# Altium PCB XM-JLINK-V1.0.0.PcbDoc
Units mil, origin at the board's own origin, x right, y up, seen from the top; angles counter-clockwise.
Board outline 3425.2 x 1574.8 mil, 2 copper layers (Top Layer, Bottom Layer); 38 components, 29 nets, 149 pads, 56 vias.
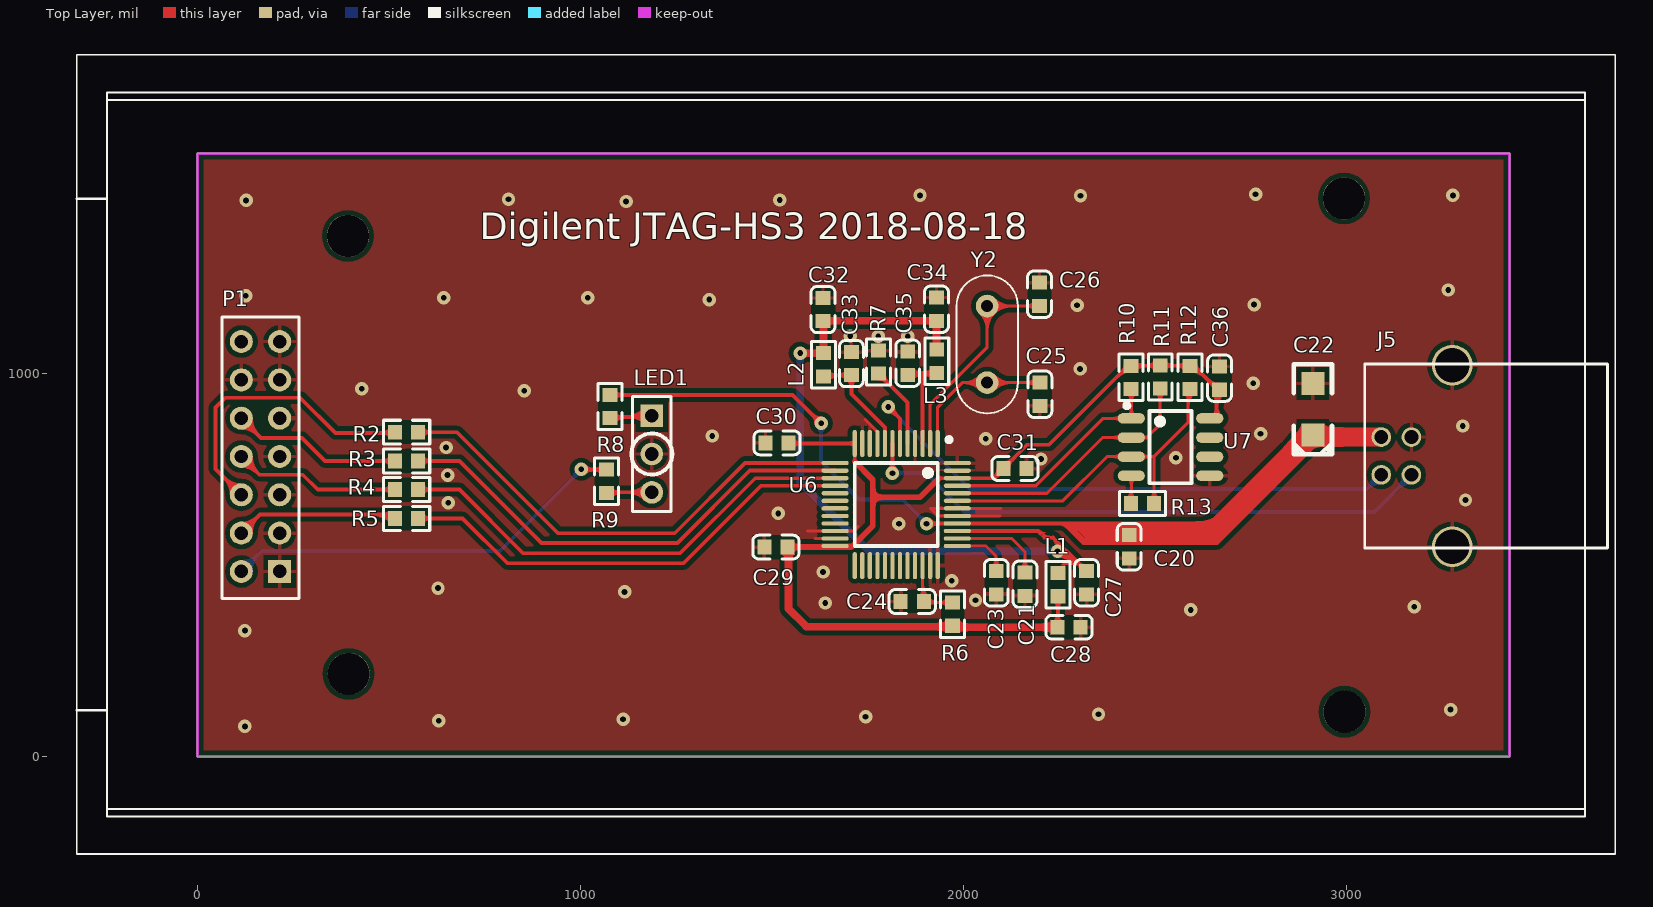
[diagram p0: Top Layer view]
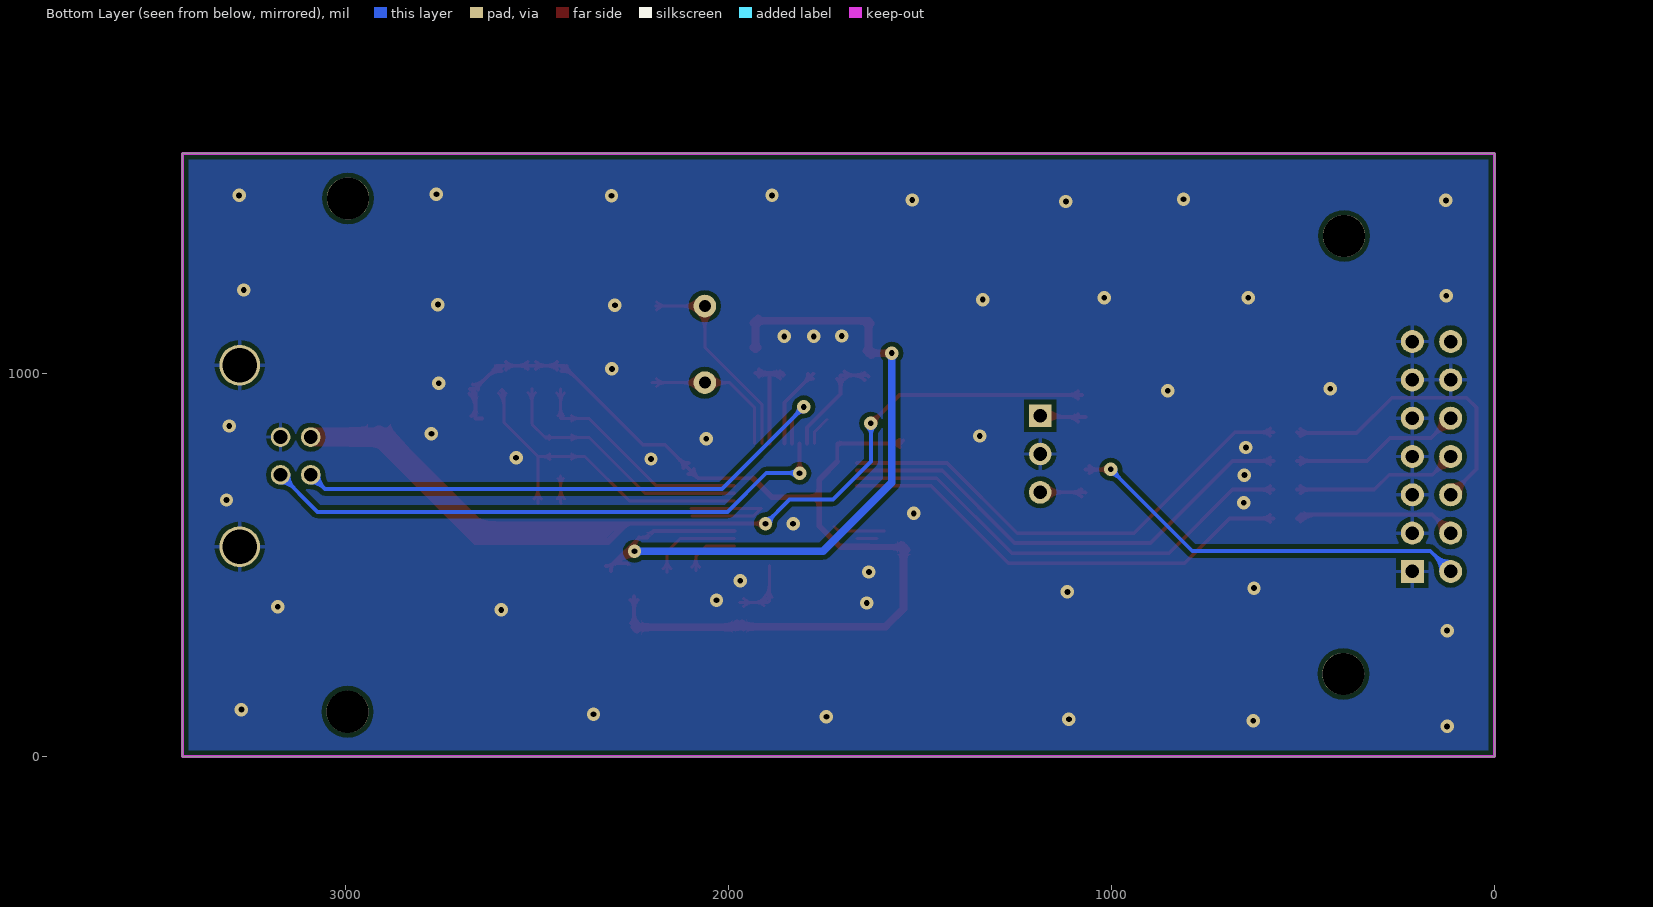
[diagram p1: Bottom Layer view, seen from below]
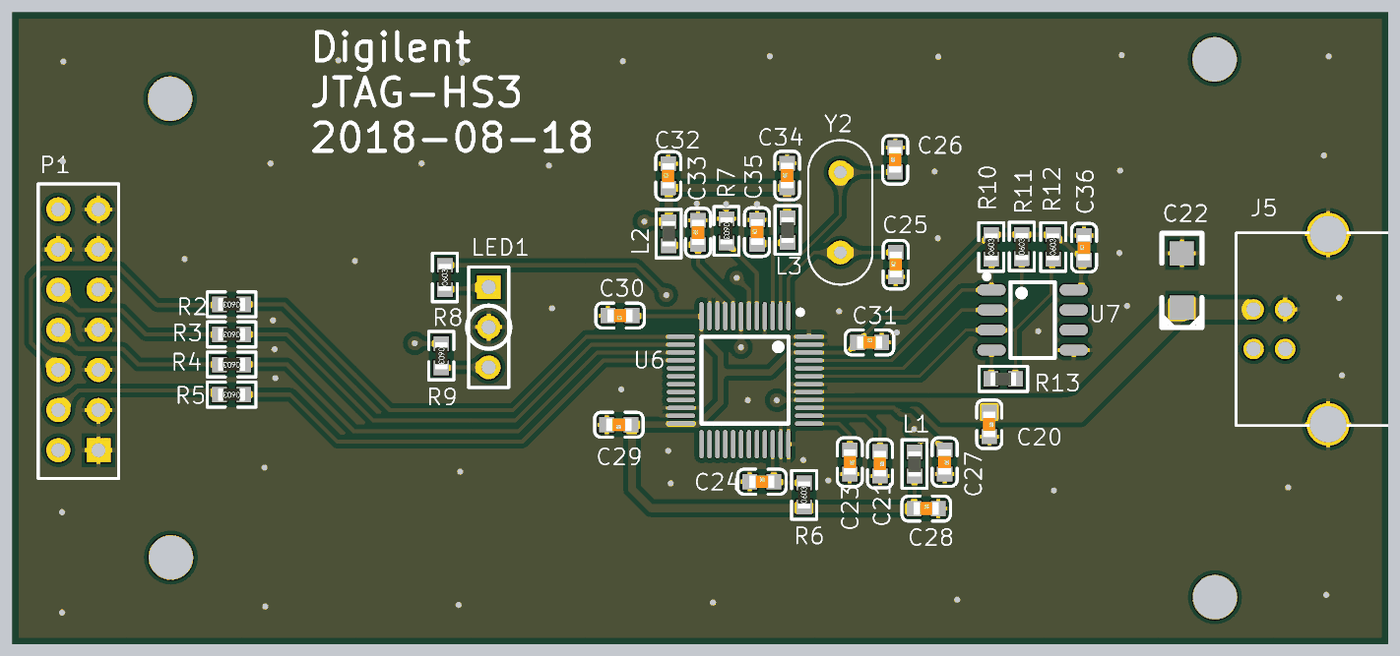
[diagram p2: 3D render of the assembled board from above, using the file's embedded part models]

## Layer stack, top to bottom
Top Layer: signal copper 1.4
Dielectric: dielectric 12.6, FR-4, Dk 4.8
Bottom Layer: signal copper 1.4

## Board outline
0,0 3425.2,0 3425.2,1574.8 0,1574.8

## Design rules (kind name [scope] priority, off if disabled: settings)
Clearance Clearance_1 [All] p1 off: gap=12
Clearance [All] p2: gap=8
ComponentClearance [All] p1: gap=0 collisioncheckmode=3 verticalgap=0 showdistances=FALSE
FabricationTestPointUsage TestPointUsage [All] p1: valid=0 allowmultiple=FALSE
FabricationTestpoint Testpoint [All] p1: side=3 testpointundercomponent=TRUE minsize=40 maxsize=100 preferedsize=60 minholesize=0 maxholesize=40 preferedholesize=32.01 testpointgrid=0.98 allowsidetop=TRUE allowsidebottom=TRUE usegrid=TRUE gridtolerance=0.01
HoleSize [All] p1: absolutevalues=TRUE maxlimit=200 minlimit=1 maxpercent=80.000 minpercent=20.000
HoleToHoleClearance [All] p1: gap=0 allowstackedmicrovias=TRUE
MinimumSolderMaskSliver [All] p1: minsoldermaskwidth=0
PolygonConnect [IsVia] p1: connectstyle=Direct reliefconductorwidth=10 reliefentries=4 polygonreliefangle="90 Angle"
RoutingLayers [All] p1: top layer_v5=FALSE bottom layer_v5=FALSE
RoutingVias [All] p1: holewidth=20 width=40 viastyle="Through Hole" minholewidth=15 minwidth=30 maxholewidth=20 maxwidth=40
SilkToSilkClearance [All] p1: silktosilkclearance=0
SilkscreenOverComponentPads [IsPad] p1: minsilkscreentomaskgap=0
SolderMaskExpansion [All] p1: expansion=4
Width [All] p1: maxlimit=50 minlimit=8 preferedwidth=10
19 further rules are at their usual default settings.

## Components (designator, comment, footprint, x,y, rotation, side; value= is the part's Value field where it differs from the comment)
C20 "0.1uF" LC-0603_C 2432,548 r270 top
C21 "0.1uF" LC-0603_C 2160,450 r270 top
C22 "10uF" C1206 2912,839 r90 top
C23 "0.1uF" LC-0603_C 2085,454 r270 top
C24 "0.1uF" LC-0603_C 1866,405 r0 top
C25 "27pF" LC-0603_C 2199,946 r90 top
C26 "27pF" LC-0603_C 2198,1207 r90 top
C27 "0.1uF" LC-0603_C 2321,454 r270 top
C28 "0.1uF" LC-0603_C 2275,338 r0 top
C29 "0.1uF" LC-0603_C 1510,547 r180 top
C30 "0.1uF" LC-0603_C 1513,819 r180 top
C31 "0.1uF" LC-0603_C 2134,752 r0 top
C32 "0.1uF" LC-0603_C 1633,1167 r90 top
C33 "0.1uF" LC-0603_C 1707,1026 r90 top
C34 "0.1uF" LC-0603_C 1929,1168 r90 top
C35 "0.1uF" LC-0603_C 1854,1027 r90 top
C36 "0.1uF" LC-0603_C 2668,988 r90 top
J5 "USB" USB-B 3090,785 r90 top locked
L1 "120OHM@100Mhz" LC-0603_L 2246,449 r270 top
L2 "120OHM@100Mhz" LC-0603_L 1634,1023 r270 top
L3 "120OHM@100Mhz" LC-0603_L 1930,1032 r270 top
LED1 "LED2" HDR1X3 1186,890 r270 top
P1 "Header 7X2" HDR2X14 215,295 r90 top locked
R2 "Res1" LC-0603_R 546,847 r180 top
R3 "Res1" LC-0603_R 546,772 r180 top
R4 "Res1" LC-0603_R 546,697 r180 top
R5 "Res1" LC-0603_R 546,622 r180 top
R6 "Res1" LC-0603_R 1971,372 r90 top
R7 "Res1" LC-0603_R 1778,1030 r270 top
R8 "Res1" LC-0603_R 1077,914 r90 top
R9 "Res1" LC-0603_R 1068,719 r270 top
R10 "Res1" LC-0603_R 2437,990 r90 top
R11 "Res1" LC-0603_R 2513,991 r90 top
R12 "Res1" LC-0603_R 2591,990 r90 top
R13 "Res1" LC-0603_L 2467,661 r180 top
U6 "FT232HL" LC-TQFP-48_7x7x05P 1824,658 r180 top
U7 "93LC56BISN" LC-SOIC-8_150mil 2540,808 r270 top
Y2 "12M" CRYSTAL 2010,1102 r90 top

## Footprints (in the part's own frame and the unit in brackets; to place one, negate y for a bottom-side part, rotate by r counter-clockwise, add the part's x,y. Pads: shape width x height; smd on the part's side, far side on the other; paste and mask are expansions set on the pad)
C1206 [mil]
  rect 60x60 smd: 1(0.12,0.45) 2(135.12,0.45)
  silkscreen extent -50,-50 185,50
CRYSTAL [mm]
  round 1.5 hole 0.8: 1(1.884,-1.304) 2(-3.196,-1.304)
  silkscreen extent -5.23,-3.34 3.92,0.73
HDR1X3 [mm] "Connector; Header; 3 Position"
  rect 1.5x1.5 hole 0.9: 1(0,0)
  round 1.5 hole 0.9: 2(2.54,0) 3(5.08,0)
  silkscreen extent -1.27,-1.27 6.35,1.27
HDR2X14 [mil]
  rect 60x60 hole 35: 1(188.52,0.36)
  round 60 hole 35: 2(188.52,100.36) 3(288.52,0.36) 4(288.52,100.36) 5(388.52,0.36) 6(388.52,100.36) 7(488.52,0.36) 8(488.52,100.36) 9(588.52,0.36) 10(588.52,100.36) 11(688.52,0.36) 12(688.52,100.36) 13(788.52,0.36) 14(788.52,100.36)
  silkscreen extent 118,-50 852,150
LC-0603_C [mm]
  rect 0.93x0.98 smd: 1(-0.77,0) 2(0.77,0)
  silkscreen extent -1.53,-0.79 1.54,0.79, body extent -0.8,-0.4 0.8,0.4, height 0.3
LC-0603_L [mm]
  rect 0.93x0.98 smd: 1(-0.77,0) 2(0.77,0)
  silkscreen extent -1.53,-0.79 1.54,0.79, body extent -0.82,-0.41 0.82,0.41, height 0.46
LC-0603_R [mm]
  rect 0.93x0.98 smd: 1(-0.77,0) 2(0.77,0)
  silkscreen extent -1.53,-0.79 1.54,0.79, body extent -0.85,-0.4 0.85,0.4, height 0.56
LC-SOIC-8_150mil [mm]
  oval 0.7x1.8 smd: 1(-1.905,-2.6) 2(-0.635,-2.6) 3(0.635,-2.6) 4(1.905,-2.6) 5(1.905,2.6) 6(0.635,2.6) 7(-0.635,2.6) 8(-1.905,2.6)
  silkscreen extent -2.9,-3.05 2.4,1.4
LC-TQFP-48_7x7x05P [mm]
  oval 0.28x1.8 smd mask+0.051: 1(-2.75,-4.05) 2(-2.25,-4.05) 3(-1.75,-4.05) 4(-1.25,-4.05) 5(-0.75,-4.05) 6(-0.25,-4.05) 7(0.25,-4.05) 8(0.75,-4.05) 9(1.25,-4.05) 10(1.75,-4.05) 11(2.25,-4.05) 12(2.75,-4.05) 25(2.75,4.05) 26(2.25,4.05) 27(1.75,4.05) 28(1.25,4.05) 29(0.75,4.05) 30(0.25,4.05) 31(-0.25,4.05) 32(-0.75,4.05) 33(-1.25,4.05) 34(-1.75,4.05) 35(-2.25,4.05) 36(-2.75,4.05)
  oval 1.8x0.28 smd mask+0.051: 13(4.05,-2.75) 14(4.05,-2.25) 15(4.05,-1.75) 16(4.05,-1.25) 17(4.05,-0.75) 18(4.05,-0.25) 19(4.05,0.25) 20(4.05,0.75) 21(4.05,1.25) 22(4.05,1.75) 23(4.05,2.25) 24(4.05,2.75) 37(-4.05,2.75) 38(-4.05,2.25) 39(-4.05,1.75) 40(-4.05,1.25) 41(-4.05,0.75) 42(-4.05,0.25) 43(-4.05,-0.25) 44(-4.05,-0.75) 45(-4.05,-1.25) 46(-4.05,-1.75) 47(-4.05,-2.25) 48(-4.05,-2.75)
  silkscreen extent -3.65,-4.45 2.75,2.75
USB-B [mm]
  round 2.7 hole 2.3: 0(-6.02,-4.71) 0(6.02,-4.71)
  round 1.3 hole 0.92: 1(1.25,0) 2(-1.25,0) 3(-1.25,-2) 4(1.25,-2)
  silkscreen extent -6.1,-15 6.1,1.1

## Part data
C20 C21 C22 C23 C24 C25 C26 C27 C28 C29 C30 C31 C32 C33 C34 C35 C36: library part CAP, "Capacitor"
J5: library part "Header 4", "Header, 4-Pin"
L1 L2 L3: library part Inductor, "Inductor"
P1: "Header, 7-Pin, Dual row"
R2 R3 R4 R5 R6 R7 R8 R9 R10 R11 R12 R13: "Resistor"
Y2: library part XTAL

## Free pads (board coordinates)
  round 110 hole 110: 3(2992.79,1457.2) 4(2993.79,117.2) 5(392.79,1359.2) 5(394.79,216.2)

## Via types
v1: diameter 35, hole 15, Top Layer to Bottom Layer, tented both sides, 56 vias

## Nets (pads, with @x,y where several pads share a name; then routed paths per layer and width w, separated by ;. In a path a pad name is that pad's centre, name@x,y a point inside that pad or via, vN(x,y) a via of type N, cw(c..) or ccw(c..) an arc to the next point about the centre after c; other vN are vias at no path point)
+3P3V: C28.1 C29.1 C30.1 C31.1 C36.1 L1.2 R6.1 R10.2 R11.2 R12.2 U6.12 U6.24 U6.46 U7.8 | length 4996.5
  Top Layer w10: C29.1 C29.1@1543,547 ; 1543,386 1543,379 1580.31,341.69 1587.31,341.69 R6.1 1973.69,339 2238.32,339 2239.32,338 2246,331.31 2246,339.31 L1.2 ; C29.1@1543,544.31 C29.1@1543,547 ; C30.1@1543.32,825 1550.87,817.45 U6.12 1715.73,770.27 ; C29.1@1549.72,538.57 cw(c1576.66,511.64) 1576.66,549.73 ; C29.1@1549.72,557.39 ccw(c1568.22,575.89) 1568.22,549.73 ; C30.1@1552.72,808.61 cw(c1574.07,787.26) 1574.07,817.45 ; C30.1@1552.72,827.43 ccw(c1576.81,851.51) 1576.81,817.45 ; C29.1@1555.05,549.73 U6.24 1707.28,549.73 1710.73,549.73 ; 1763,677 1764,676 1885,676 1886,677 ; 1935.9,726.9 U6.46 2078.58,726.9 C31.1 2165.68,814 2223,814 2429.32,1020.32 R10.2 R12.2 2600.68,1020.32 2661.32,959.68 C36.1@2675,959.68 ; R6.1@1960.61,332.28 ccw(c1937.89,309.56) 1937.89,341.69 ccw(c1937.89,373.81) R6.1@1960.61,351.09 ; R6.1@1981.39,332.28 cw(c1997.63,316.04) 1997.63,339 ; R6.1@1981.39,351.09 ccw(c2010.59,380.29) 2010.59,339 ; 2079.29,727.6 cw(c2103.68,703.21) C31.1@2103.68,737.71 ; 2081.66,729.98 ccw(c2060.63,751.02) C31.1@2090.38,751.02 ; C31.1@2103.68,766.29 ccw(c2103.68,800.79) 2128.08,776.4 ; C31.1@2116.99,752.98 cw(c2146.74,752.98) 2125.71,774.02 ; 2212.52,339 cw(c2212.52,306.82) C28.1@2235.28,329.57 ; 2212.6,339 ccw(c2212.6,371.07) 2235.28,348.39 ccw(c2209.38,374.29) 2246,374.29 ; L1.2@2236.59,409.28 cw(c2213.87,386.56) 2246,386.56 cw(c2278.13,386.56) L1.2@2255.41,409.28 ; 2246,367.94 ccw(c2273.64,367.94) C28.1@2254.09,348.39 ; 2401.86,992.86 cw(c2436.02,958.7) R10.2@2436.02,1007.01 ; R10.2@2418.04,1009.04 ccw(c2406.76,1020.32) R10.2@2422.71,1020.32 ; R10.2@2418.93,1009.93 cw(c2436.02,992.85) R10.2@2436.02,1017.01 ; R10.2@2447.39,1010.91 cw(c2470.11,988.19) 2470.11,1020.32 cw(c2470.11,1052.44) R10.2@2447.39,1029.72 ; 2477.48,1020.32 ccw(c2477.48,1055.86) R11.2@2502.61,1030.72 ; 2482.3,1020.32 cw(c2482.3,991.6) R11.2@2502.61,1011.91 ; R11.2@2523.39,1011.91 cw(c2543.7,991.6) 2543.7,1020.32 ; R11.2@2523.39,1030.72 ccw(c2548.52,1055.86) 2548.52,1020.32 ; R12.2@2580.61,1010.91 ccw(c2557.89,988.19) 2557.89,1020.32 ccw(c2557.89,1052.44) R12.2@2580.61,1029.72 ; R12.2@2591.98,1007.01 cw(c2591.98,953.88) 2629.55,991.45 ; R12.2@2591.98,1017.01 cw(c2591.98,988.02) 2612.48,1008.52 ; R12.2@2605.29,1020.32 ccw(c2616.41,1020.32) R12.2@2608.55,1012.45 ; 2637.98,983.02 ccw(c2667.02,1012.05) C36.1@2667.02,970.99 ; U7.8 2660,883 2660,949.68 C36.1 ; 2646.92,974.08 cw(c2630.52,957.68) C36.1@2653.71,957.68 ; 2660,908.62 cw(c2716.08,908.62) C36.1@2676.43,948.28 ; 2660,913.89 ccw(c2694.91,913.89) U7.8@2670.22,889.21 ; 2660,932.76 cw(c2691.94,932.76) C36.1@2669.35,955.35 ; C29.1@1543,547 1543,556.31 1552.32,547 C29.1@1543,547
  Top Layer w15: C29.1@1547.96,539.36 cw(c1566.41,520.91) 1566.41,547 cw(c1566.41,573.09) C29.1@1547.96,554.64 ; C29.1@1552.32,547 1705.79,547 ; U6.24@1631.41,548.41 1705.95,548.41 ; 1710.73,549.73 1716.5,555.5 1763,602 1763,677 ; 1715.73,770.27 1763,723 1763,677 ; 1935.9,726.9 1886,677 1763,677
  Top Layer w20: C29.1@1534.44,540.14 cw(c1513.78,519.48) 1543,519.48 ; C29.1 1543,544.31 1543,386 1587.31,341.69 1590,339 1973.69,339 1974.69,338 2239.32,338 C28.1 C28.1@2246,339.31 ; 1943.48,339 ccw(c1943.48,368.22) R6.1@1964.14,347.56 ; R6.1@1977.86,347.56 ccw(c2000.94,370.64) 2000.94,338 ; C28.1@2238.81,332.13 ccw(c2224.63,317.94) 2224.63,338 ccw(c2224.63,358.06) C28.1@2238.81,343.87
+3POUTV: C27.1 C32.1 C34.1 L1.1 L2.1 L3.1 U6.39 | length 2662.9
  Top Layer w10: v1@1573,1053 v1(1573.31,1053.31) ; L2.1@1629,1058.31 L2.1 ; C34.1@1921.82,1134.68 C34.1@1927,1134.68 ; U6.39 2194.9,589.1 ; 2212.5,571.5 2233.82,571.5 C27.1@2305.32,500 ; 2233.61,571.7 cw(c2208.52,546.6) v1@2242.6,536.7 ; v1@2245,543.5 cw(c2245,502.9) 2273.7,531.61 ; 2245.57,559.75 cw(c2227.04,541.22) v1@2252.2,533.91 ; v1@2253.5,544.5 2293,505 2263,505 ; 2278.29,519.71 ccw(c2245,486.42) 2245,533.5 cw(c2245,468.76) 2290.78,514.54 ; 2295.36,502.64 ccw(c2245,452.28) 2245,523.5 cw(c2245,434.62) C27.1@2307.85,497.47 ; 2296.6,508.71 cw(c2272.21,484.31) C27.1@2306.71,484.31 ; 2298.98,506.34 ccw(c2320.02,527.37) C27.1@2320.02,497.62
  Top Layer w20: v1(1573.31,1053.31) L2.1 C32.1@1634,1121.68 ; v1@1578.62,1048.01 cw(c1591.42,1035.21) 1591.42,1053.31 cw(c1591.42,1071.42) v1@1578.62,1058.62 ; L2.1@1627.14,1047.44 ccw(c1612.96,1033.26) 1612.96,1053.31 ccw(c1612.96,1073.37) L2.1@1627.14,1059.19 ; C32.1@1628.11,1130.81 cw(c1613.89,1116.59) 1634,1116.59 ; L2.1@1628.13,1059.19 ccw(c1613.94,1073.37) 1634,1073.37 ccw(c1654.06,1073.37) L2.1@1639.87,1059.19 ; C32.1 1633.82,1137.5 C34.1@1921.82,1137.5 ; 1634,1116.67 cw(c1654,1116.67) 1639.86,1130.81 cw(c1656.01,1114.66) 1656.01,1137.5 ; 1907.51,1137.5 ccw(c1907.51,1158.19) C34.1@1922.14,1143.56 ; 1908.41,1137.5 cw(c1908.41,1118.08) C34.1@1922.14,1131.81 ; L3.1@1923.14,1068.19 ccw(c1909,1082.33) 1929,1082.33 ; C34.1@1923.13,1131.81 cw(c1908.94,1117.63) 1929,1117.63 cw(c1949.06,1117.63) C34.1@1934.87,1131.81 ; L3.1@1929,1063.31 C34.1 ; 1929,1082.41 ccw(c1949.11,1082.41) L3.1@1934.89,1068.19
  Bottom Layer w20: v1@1568.01,1048.01 cw(c1555.21,1035.21) 1573.31,1035.21 cw(c1591.42,1035.21) v1@1578.62,1048.01 ; v1(1573.31,1053.31) 1573.31,715.69 1753,536 v1(2245,536) ; v1@2239.7,530.7 ccw(c2226.89,517.89) 2226.89,536 ccw(c2226.89,554.11) v1@2239.7,541.3
EECLK: R11.1 U6.44 U7.2 | length 813.4
  Top Layer w8: U6.44 2217.53,687.53 2363,833 U7.2 2478,833 ; U7.2@2409.07,826.08 ccw(c2392.37,809.39) 2392.37,833 ccw(c2392.37,856.61) U7.2@2409.07,839.92 ; U7.2@2467.32,827.42 cw(c2478,820) 2478,833 ; U7.2@2467.32,838.58 ccw(c2478,846) 2478,833 ; R11.1@2502.88,950.57 cw(c2478.46,926.14) 2513,926.14 cw(c2547.54,926.14) R11.1@2523.12,950.57 ; R11.1 2513,868 2478,833
EECS: R10.1 U6.45 U7.1 | length 732.4
  Top Layer w8: U6.45 2188.21,707.21 2364,883 U7.1 2437.64,959.05 R10.1 ; U7.1@2409.07,876.08 ccw(c2392.37,859.39) 2392.37,883 ccw(c2392.37,906.61) U7.1@2409.07,889.92 ; R10.1@2427.87,949.57 cw(c2404.28,925.98) 2437.64,925.98 ; U7.1@2430.72,889.92 ccw(c2414.03,906.61) 2437.64,906.61 ccw(c2461.25,906.61) U7.1@2444.55,889.92 ; 2437.64,924.31 cw(c2473.36,924.31) R10.1@2448.1,949.57
EEDATA: R12.1 R13.1 U6.43 U7.3 | length 1104.9
  Top Layer w8: U6.43 2258.84,667.84 2374,783 U7.3 2496.31,783 2497.31,784 ; U7.3@2409.07,776.08 ccw(c2392.37,759.39) 2392.37,783 ccw(c2392.37,806.61) U7.3@2409.07,789.92 ; U7.3@2466.21,776.08 cw(c2482.9,759.39) 2482.9,783 cw(c2482.9,806.61) U7.3@2466.21,789.92 ; R13.1@2487.2,672.1 ccw(c2462.77,696.52) 2497.31,696.52 ccw(c2531.86,696.52) R13.1@2507.43,672.1 ; R13.1 2497.31,784 ; R12.1@2579.9,949.57 cw(c2565.17,934.84) 2586,934.84 ; 2586,915.45 cw(c2634.25,915.45) R12.1@2600.13,949.57 ; 2586,934.76 cw(c2614.94,934.76) R12.1@2594.48,955.23 ; R12.1 2586,954.69 2586,872.69 2497.31,784
FPGA_TCK: P1.6 R2.2 | length 976
  Top Layer w10: P1.6@89.64,683.52 ccw(c29.28,683.52) 71.96,726.2 ccw(c114.64,768.88) P1.6@114.64,708.52 ; P1.6@99.64,683.52 ccw(c63.42,683.52) 89.03,709.13 ccw(c114.64,734.73) P1.6@114.64,698.52 ; P1.6 47,751.16 47,911 73,937 268,937 360,845 513.68,845 R2.2 ; 481.11,845 ccw(c481.11,880.59) R2.2@506.28,855.43 ; 486.01,845 cw(c486.01,816.34) R2.2@506.28,836.61
FPGA_TDI: P1.10 R3.2 | length 649.4
  Top Layer w10: P1.10@114.64,858.52 cw(c114.64,798.16) 157.32,840.84 cw(c199.99,883.52) P1.10@139.64,883.52 ; P1.10@114.64,868.52 cw(c114.64,832.31) 140.24,857.91 cw(c165.85,883.52) P1.10@129.64,883.52 ; P1.10 166.16,832 273,832 333,772 R3.2 ; R3.2@506.28,762.59 ccw(c483.56,739.87) 483.56,772 ccw(c483.56,804.13) R3.2@506.28,781.41
FPGA_TDO: P1.8 R4.2 | length 639
  Top Layer w10: P1.8@114.64,758.52 cw(c114.64,698.16) 157.32,740.84 cw(c199.99,783.52) P1.8@139.64,783.52 ; P1.8@114.64,768.52 cw(c114.64,732.31) 140.24,757.91 cw(c165.85,783.52) P1.8@129.64,783.52 ; P1.8 162.16,736 275,736 314,697 R4.2 ; R4.2@506.28,687.59 ccw(c483.56,664.87) 483.56,697 ccw(c483.56,729.13) R4.2@506.28,706.41
FPGA_TMS: P1.4 R5.2 | length 656.8
  Top Layer w10: P1.4 163.12,632 505.68,632 R5.2 ; P1.4@114.64,598.52 ccw(c114.64,634.73) 140.24,609.13 ccw(c165.85,583.52) P1.4@129.64,583.52 ; P1.4@114.64,608.52 ccw(c114.64,668.88) 157.32,626.2 ccw(c199.99,583.52) P1.4@139.64,583.52 ; 461.79,632 cw(c461.79,569.09) R5.2@506.28,613.57 ; 485.93,632 cw(c485.93,593.23) R5.2@513.35,620.65
GND: C20.2 C21.2 C22.2 C23.2 C24.1 C25.1 C26.2 C27.2 C28.2 C29.2 C30.2 C31.2 C32.2 C33.2 C34.2 C35.2 C36.2 J5.0 J5.4 LED1.2 P1.1 P1.3 P1.5 P1.7 P1.9 P1.11 P1.12 P1.13 R7.1 U6.4 U6.9 U6.10 U6.11 U6.22 U6.23 U6.35 U6.36 U6.41 U6.42 U6.47 U6.48 U7.5 | length 635.9
  Top Layer w8: 1592.9,589.1 U6.22 1712.1,589.1 1724,601 ; 1612.58,569.42 U6.23 ; 1743,880 1774.79,848.21 U6.9 ; 2094.47,628.47 U6.41 1933.84,628.47 1914.16,648.16 U6.42 2097.84,648.16
  other v1: 124,79 630,94 1111,98 1744,104 2352,111 3271,123 124,329 2593,383 3176,391 1639,401 2031,408 1115,430 628,440 1969,459 1633,482 1831,608 1516,635 655,663 3310,670 653,735 2202,777 2554,780 649,807 2058,830 1344,837 2775,843 3303,863 853,955 429,960 2756,975 2304,1012 1777,1097 1854,1097 1704,1098 2296,1178 2758,1180 1336,1193 643,1198 1019,1198 126,1203 3265,1218 1119,1449 127,1452 1520,1453 812,1455 2305,1464 1886,1465 3277,1465 2762,1468
NetC21_1: C21.1 U6.38 | length 299.7
  Top Layer w8: U6.38 2125.58,569.42 2160,535 C21.1 ; C21.1@2149.88,490.43 ccw(c2125.46,514.86) 2160,514.86 ccw(c2194.54,514.86) C21.1@2170.12,490.43
NetC23_1: C23.1 U6.37 | length 205.6
  Top Layer w8: U6.37 2058.27,549.73 2085,523 C23.1 ; C23.1@2074.88,494.43 ccw(c2050.46,518.86) 2085,518.86 ccw(c2119.54,518.86) C23.1@2095.12,494.43
NetC24_2: C24.2 R6.2 U6.34 | length 372.9
  Top Layer w8: C24.2@1886.2,416.1 ccw(c1870.03,432.27) 1892.9,432.27 ; 1892.9,429.46 ccw(c1919.79,429.46) C24.2@1900.77,410.44 ; 1892.9,448.78 ccw(c1939.11,448.78) C24.2@1906.43,416.1 ; U6.34 1892.9,405.42 1894,404.31 1896,402.32 R6.2 ; C24.2@1900.77,408.48 ccw(c1915.65,423.35) 1915.65,402.32 ; C24.2@1906.43,393.9 cw(c1926.75,373.58) 1926.75,402.32 ; C24.2@1906.43,414.13 ccw(c1934.96,442.66) 1934.96,402.32 ; R6.2@1959.9,392.2 ccw(c1935.48,367.77) 1935.48,402.32 ccw(c1935.48,436.86) R6.2@1959.9,412.43
NetC25_2: C25.2 U6.1 Y2.2 | length 768.9
  Top Layer w8: U6.1 1932.27,912.27 1996.18,976.18 Y2.2 2198.87,976.18 C25.2 ; Y2.2@2043.29,958.13 ccw(c1999.71,914.56) 1999.71,976.18 ccw(c1999.71,1037.81) Y2.2@2043.29,994.23 ; Y2.2@2048.95,963.79 ccw(c2019.03,933.87) 2019.03,976.18 ccw(c2019.03,1018.5) Y2.2@2048.95,988.58 ; Y2.2@2073.74,963.79 cw(c2103.66,933.87) 2103.66,976.18 cw(c2103.66,1018.5) Y2.2@2073.74,988.58 ; Y2.2@2079.39,958.13 cw(c2122.97,914.56) 2122.97,976.18 cw(c2122.97,1037.81) Y2.2@2079.39,994.23 ; 2163.16,976.18 ccw(c2163.16,1011.17) C25.2@2187.9,986.43 ; 2163.79,976.18 cw(c2163.79,942.09) C25.2@2187.9,966.2
NetC26_1: C26.1 U6.2 Y2.1 | length 930.3
  Top Layer w8: U6.2 1912.58,919.58 2061.34,1068.34 Y2.1 C26.1@2190.5,1176.18 ; Y2.1@2043.29,1158.13 cw(c1999.71,1114.56) 2061.34,1114.56 cw(c2122.97,1114.56) 2079.39,1158.13 cw(c2122.97,1114.56) 2122.97,1176.18 cw(c2122.97,1237.81) Y2.1@2079.39,1194.23 ; Y2.1@2048.95,1163.79 cw(c2019.03,1133.87) 2061.34,1133.87 cw(c2103.66,1133.87) 2073.74,1163.79 cw(c2103.66,1133.87) 2103.66,1176.18 cw(c2103.66,1218.5) Y2.1@2073.74,1188.58 ; 2161.27,1176.18 ccw(c2161.27,1212.43) C26.1@2186.9,1186.8 ; 2163.68,1176.18 cw(c2163.68,1143.35) C26.1@2186.9,1166.57
NetJ5_2: J5.2 U6.6 | length 1672.1
  Top Layer w10: v1@1803,900.5 cw(c1803,870.32) 1824.34,891.66 cw(c1845.68,913) v1@1815.5,913 ; v1(1803,913) 1833.84,882.16 U6.6
  Bottom Layer w10: v1@1803,900.5 cw(c1803,870.32) 1824.34,891.66 cw(c1845.68,913) v1@1815.5,913 ; v1(1803,913) 2017,699 3053.21,699 J5.2 ; J5.2@3069.41,735.79 cw(c3019.7,735.79) 3054.85,700.64 cw(c3090,665.49) J5.2@3090,715.2
NetJ5_3: J5.3 U6.7 | length 1687.1
  Top Layer w10: v1@1805.16,748.84 ccw(c1783.44,770.56) 1814.16,770.56 ; v1(1814,740) 1814.16,740.16 U6.7 ; 1814.16,769.8 ccw(c1843.8,769.8) v1@1822.84,748.84
  Bottom Layer w10: v1(1814,740) 1901,740 2002,639 3071.95,639 J5.3 ; v1@1822.84,731.16 cw(c1844.18,709.82) 1844.18,740 cw(c1844.18,770.18) v1@1822.84,748.84 ; J5.3@3148.15,735.79 cw(c3098.44,735.79) 3133.59,700.64 cw(c3168.74,665.49) J5.3@3168.74,715.2
NetLED1_1: LED1.1 R8.1 | length 300.4
  Top Layer w10: R8.1@1068,886.31 1182.31,886.31 LED1.1 ; R8.1@1087.39,874.28 cw(c1116.46,845.21) 1116.46,886.31 ; R8.1@1087.39,893.09 ccw(c1103.76,909.46) 1103.76,886.31 ; 1117.89,886.31 ccw(c1117.89,958.11) LED1.1@1168.66,907.34 ; 1135.68,886.31 cw(c1135.68,839.68) LED1.1@1168.66,872.66 ; 1142.03,886.31 ccw(c1142.03,933.97) LED1.1@1175.73,900.27
NetLED1_3: LED1.3 R9.2 | length 317.1
  Top Layer w10: R9.2 1069.32,690 LED1.3 ; R9.2@1078.39,679.28 cw(c1104.29,653.38) 1104.29,690 ; R9.2@1078.39,698.09 ccw(c1097.94,717.64) 1097.94,690 ; LED1.3@1168.66,672.66 ccw(c1126.79,630.79) 1126.79,690 ccw(c1126.79,749.21) LED1.3@1168.66,707.34 ; LED1.3@1175.73,679.73 ccw(c1150.93,654.93) 1150.93,690 ccw(c1150.93,725.07) LED1.3@1175.73,700.27
NetR2_1: R2.1 U6.13 | length 1324
  Top Layer w10: R2.1 677,847 941,583 1246,583 1429.27,766.27 U6.13 ; R2.1@585.72,837.59 cw(c608.44,814.87) 608.44,847 cw(c608.44,879.13) R2.1@585.72,856.41
NetR3_1: R3.1 U6.14 | length 1305.5
  Top Layer w10: R3.1 684,772 898,558 1253,558 1441.58,746.58 U6.14 ; R3.1@585.72,762.59 cw(c608.44,739.87) 608.44,772 cw(c608.44,804.13) R3.1@585.72,781.41
NetR4_1: R4.1 U6.15 | length 1288.6
  Top Layer w10: R4.1 684,697 850,531 1260,531 1455.9,726.9 U6.15 ; R4.1@585.72,687.59 cw(c608.44,664.87) 608.44,697 cw(c608.44,729.13) R4.1@585.72,706.41
NetR5_1: R5.1 U6.16 | length 1270.9
  Top Layer w10: R5.1 692,622 809,505 1269,505 1471.21,707.21 U6.16 ; R5.1@585.72,612.59 cw(c608.44,589.87) 608.44,622 cw(c608.44,654.13) R5.1@585.72,631.41
NetR7_2: R7.2 U6.5 | length 264
  Top Layer w10: R7.2 1853.53,924.16 U6.5 ; R7.2@1778.98,986.38 cw(c1778.98,956.63) 1800.02,977.66 ; R7.2@1792.29,999.68 ccw(c1826.79,999.68) 1802.4,975.29
NetR13_2: R13.2 U7.4 | length 163.7
  Top Layer w8: R13.2@2426.57,672.1 ccw(c2399.84,698.83) 2437.64,698.83 ; U7.4@2430.72,726.08 cw(c2414.03,709.39) 2437.64,709.39 cw(c2461.25,709.39) U7.4@2444.55,726.08 ; R13.2 2437.64,661.95 U7.4 ; 2437.64,694.22 ccw(c2468.92,694.22) R13.2@2446.8,672.1
USB_5V: C20.1 C22.1 J5.1 R8.2 U6.40 | length 6262.2
  Top Layer w10: R8.2 1553.68,944.32 v1(1628,870) ; R8.2@1087.39,934.91 cw(c1110.11,912.19) 1110.11,944.32 cw(c1110.11,976.44) R8.2@1087.39,953.72 ; v1@1615.5,870 ccw(c1585.32,870) 1606.66,891.34 ccw(c1628,912.68) v1@1628,882.5 ; v1@1903.79,608.79 U6.40 2262,608.79 ; v1@1911.84,599.16 cw(c1935.08,575.92) 1935.08,608.79 ; v1@1911.84,616.84 ccw(c1931.28,636.28) 1931.28,608.79 ; 2349.84,558 ccw(c2349.84,659.49) C20.1@2421.61,587.72 ; 2360,601 2366.79,607.79 2422.79,607.79 2413,598 2354,598 ; 2369.16,566 ccw(c2369.16,640.17) C20.1@2421.61,587.72 ; 2373.09,589 cw(c2373.09,520.39) C20.1@2421.61,568.91 ; 2373.99,558 ccw(c2373.99,635.34) C20.1@2428.68,580.65 ; 2377.35,598 cw(c2377.35,527.17) C20.1@2428.62,576.03 ; 2388.47,574 ccw(c2388.47,620.86) C20.1@2421.61,587.72 ; 2392.41,581 cw(c2392.41,539.71) C20.1@2421.61,568.91 ; 2393.3,566 ccw(c2393.3,616.03) C20.1@2428.68,580.65 ; 2397.24,589 cw(c2397.24,544.54) C20.1@2428.68,575.98 ; 2398.13,558 ccw(c2398.13,611.2) 2435.75,573.58 cw(c2417.44,591.89) C20.1@2417.44,566 ; 2400.69,598 cw(c2400.69,549.42) C20.1@2435.86,582.93 ; 2405.37,581 ccw(c2405.37,603.96) C20.1@2421.61,587.72 ; 2409.31,574 cw(c2409.31,556.61) C20.1@2421.61,568.91 ; 2412.61,574 ccw(c2412.61,596.72) C20.1@2428.68,580.65 ; C20.1@2421.18,566.51 ccw(c2441.73,587.06) 2441.73,558 ; C20.1@2421.38,569.13 ccw(c2354,504.93) 2354,598 ; 2422.27,558 ccw(c2422.27,587.06) C20.1@2442.82,566.51 ; C20.1@2423.2,588.3 ccw(c2406.02,607.79) 2432,607.79 ; C20.1@2428.25,573.58 ccw(c2465.87,611.2) 2465.87,558 ; C20.1@2435.32,580.65 ccw(c2490.01,635.34) 2490.01,558 ; C20.1@2440.8,588.3 cw(c2457.98,607.79) 2432,607.79 ; C20.1@2442.39,587.72 ccw(c2514.16,659.49) 2514.16,558 ; 2847.26,744.26 ccw(c2752.4,839.12) 2886.55,839.12 cw(c2822.41,839.12) 2867.77,793.77 ; 2864.33,761.33 ccw(c2786.54,839.12) 2896.55,839.12 cw(c2856.56,839.12) C22.1@2884.84,810.84 ; 2871.55,797.55 cw(c2911.55,757.55) C22.1@2911.55,814.12 ; 2881.4,778.4 ccw(c2820.69,839.12) C22.1@2906.55,839.12 ; C22.1@2888.62,814.62 cw(c2911.55,791.69) C22.1@2911.55,824.12 ; 2898.47,795.48 ccw(c2854.83,839.12) C22.1@2916.55,839.12 ; C22.1@2906.59,814.62 cw(c2905.37,808.55) 2911.55,808.55 ; C22.1 C22.1@2911.55,834.21 ; C22.1@2916.51,814.62 ccw(c2917.74,808.55) 2911.55,808.55 ; 2262,608.79 2272,608.79 ; 2262,608.79 2312.79,558 2661,558 2911.55,808.55 ; 2272,608.79 2299.21,608.79 ; 2272,608.79 2280.89,599.89 ; 2280.89,599.89 2314.79,566 2419.68,566 C20.1@2427.68,574 ; 2280.89,599.89 2295.11,599.89 2321,574 C20.1@2427.68,574 ; 2299.21,608.79 2337,608.79 ; 2299.21,608.79 2306.5,601.5 ; 2306.5,601.5 2327,581 2352,581 ; 2306.5,601.5 2320.5,601.5 ; 2320.5,601.5 2331.5,601.5 2344,589 ; 2320.5,601.5 2333,589 2344,589 ; 2337,608.79 2433,608.79 ; 2337,608.79 2346,599.79 2346,598 2355.79,607.79 2363.79,607.79 2354,598 ; 2344,589 2353,598 2354,598 ; 2344,589 2424,589 C20.1@2432,581 ; 2344,589 2352,581 ; 2352,581 C20.1@2429.32,581 ; C20.1@2427.68,574 C20.1 ; C20.1@2429.32,581 C20.1@2432,581 ; C20.1@2429.32,581 C20.1 ; C20.1 C20.1@2432,581 ; C20.1@2432,581 2432,607.79 ; 2432,607.79 2433,608.79 ; 2433,608.79 2671.79,608.79 2682.79,608.79 2908.21,834.21 C22.1@2911.55,834.21 ; 2911.55,808.55 C22.1@2911.55,834.21
  Top Layer w30: J5.1@3085.09,839.12 J5.1
  Top Layer w50: C20.1@2432,581 2644,581 2671.79,608.79 2897.21,834.21 C22.1@2908.21,834.21 ; C22.1 2916.46,834.21 J5.1
  Bottom Layer w10: v1@1619.16,861.16 cw(c1597.82,839.82) 1628,839.82 cw(c1658.18,839.82) v1@1636.84,861.16 ; v1(1628,870) 1628,770 1727,671 1840,671 v1(1903,608) ; v1@1890.5,608 ccw(c1860.32,608) 1881.66,629.34 ccw(c1903,650.68) v1@1903,620.5
VPHY: C35.1 L3.2 U6.3 | length 571.2
  Top Layer w8: C35.1 1893,996.68 ; C35.1@1865.1,986.57 cw(c1889.52,962.14) 1889.52,996.68 cw(c1889.52,1031.23) C35.1@1865.1,1006.8 ; 1906.55,996.68 cw(c1906.55,979.22) L3.2@1918.9,991.57 ; 1907.92,996.68 ccw(c1907.92,1015.7) L3.2@1923.76,1005.18 ; L3.2@1917.1,1009.6 cw(c1893,1025.62) 1893,996.68 ; L3.2 1925,996.68 1893,996.68
  Top Layer w10: C35.1 1859,1001.68 L3.2 ; C35.1@1857.32,994.35 cw(c1875.04,976.63) 1875.04,1001.68 cw(c1875.04,1016.74) C35.1@1864.39,1006.09 ; C35.1@1864.39,987.28 cw(c1899.18,952.49) 1899.18,1001.68 ; U6.3 1892.9,996.58 1893,996.68 ; L3.2@1919.61,992.28 ccw(c1896.89,969.56) 1896.89,1001.68 ccw(c1896.89,1033.81) L3.2@1919.61,1011.09
VPLL: C33.1 L2.2 U6.8 | length 440.1
  Top Layer w10: L2.2 1637,995.68 C33.1 1707,947 1794.47,859.53 U6.8 ; L2.2@1644.39,983.28 cw(c1674.35,953.32) 1674.35,995.68 ; L2.2@1644.39,1002.09 ccw(c1659.87,1017.57) 1659.87,995.68 ; C33.1@1696.61,986.28 ccw(c1673.89,963.56) 1673.89,995.68 ccw(c1673.89,1027.81) C33.1@1696.61,1005.09 ; C33.1@1697.59,986.28 cw(c1674.87,963.56) 1707,963.56 cw(c1739.13,963.56) C33.1@1716.41,986.28
VREF: P1.2 R9.1 | length 1361
  Top Layer w10: v1(1002,750) 1002.69,749.31 R9.1 ; v1@1010.84,741.16 cw(c1030.52,721.48) 1030.52,749.31 ; v1@1010.84,758.84 ccw(c1033.83,781.83) 1033.83,749.31 ; R9.1@1057.61,739.91 ccw(c1034.89,717.19) 1034.89,749.31 ccw(c1034.89,781.44) R9.1@1057.61,758.72
  Bottom Layer w10: P1.2 168.12,537 789,537 v1(1002,750) ; P1.2@114.64,498.52 ccw(c114.64,534.73) 140.24,509.13 ccw(c165.85,483.52) P1.2@129.64,483.52 ; P1.2@114.64,508.52 ccw(c114.64,568.88) 157.32,526.2 ccw(c199.99,483.52) P1.2@139.64,483.52 ; v1@989.5,750 cw(c959.32,750) 980.66,728.66 cw(c1002,707.32) v1@1002,737.5
pads on no net: P1.14 U6.17 U6.18 U6.19 U6.20 U6.21 U6.25 U6.26 U6.27 U6.28 U6.29 U6.30 U6.31 U6.32 U6.33 U7.6 U7.7

## Polygon pours and split planes (outlines as drawn)
GND on Top Layer "Top Layer-No Net" (solid, remove dead copper, pour order 0): 4,1578 4,4 0,0 3421.2,0 3425.2,4 3425.2,1574.8
GND on Bottom Layer "Top Layer-No Net" (solid, remove dead copper, pour order 2): 2,1574 2,0 -2,-4 3419.2,-4 3423.2,0 3423.2,1570.8

## Keep-outs
Keep-Out Layer:
  the board outline again, w8

## Silkscreen, mask and mechanical layers (free items; w line width, h text height)
Top Overlay:
  circle w10: c1186,790 r53.76
  lines w5: -314.96,-254.48 -314.96,1832.13 3700.79,1832.13 3700.79,-254.48 -314.96,-254.48 ; -236.22,-156.05 -236.22,1733.71 3622.05,1733.71 3622.05,-156.05 -236.22,-156.05 ; -236.22,-136.37 -236.22,1714.02 3622.05,1714.02 3622.05,-136.37 -236.22,-136.37
  lines w5.91: -314.96,121.27 -236.22,121.27 ; -314.96,1455.91 -236.22,1455.91
  text "Digilent JTAG-HS3 2018-08-18" at 737,1350 h70

## Dimensions
-4,1580 to 3425.2,1574.8 on Mechanical 15